# Altium PCB pcbxiao.PcbDoc (part 3 of 3)
Units mil, origin at the board's own origin, x right, y up, seen from the top; angles counter-clockwise.
Board outline 4666.32 x 1182.42 mil, 4 copper layers (Top Layer, Mid-Layer 1, Mid-Layer 2, Bottom Layer); 288 components, 144 nets, 734 pads, 278 vias.
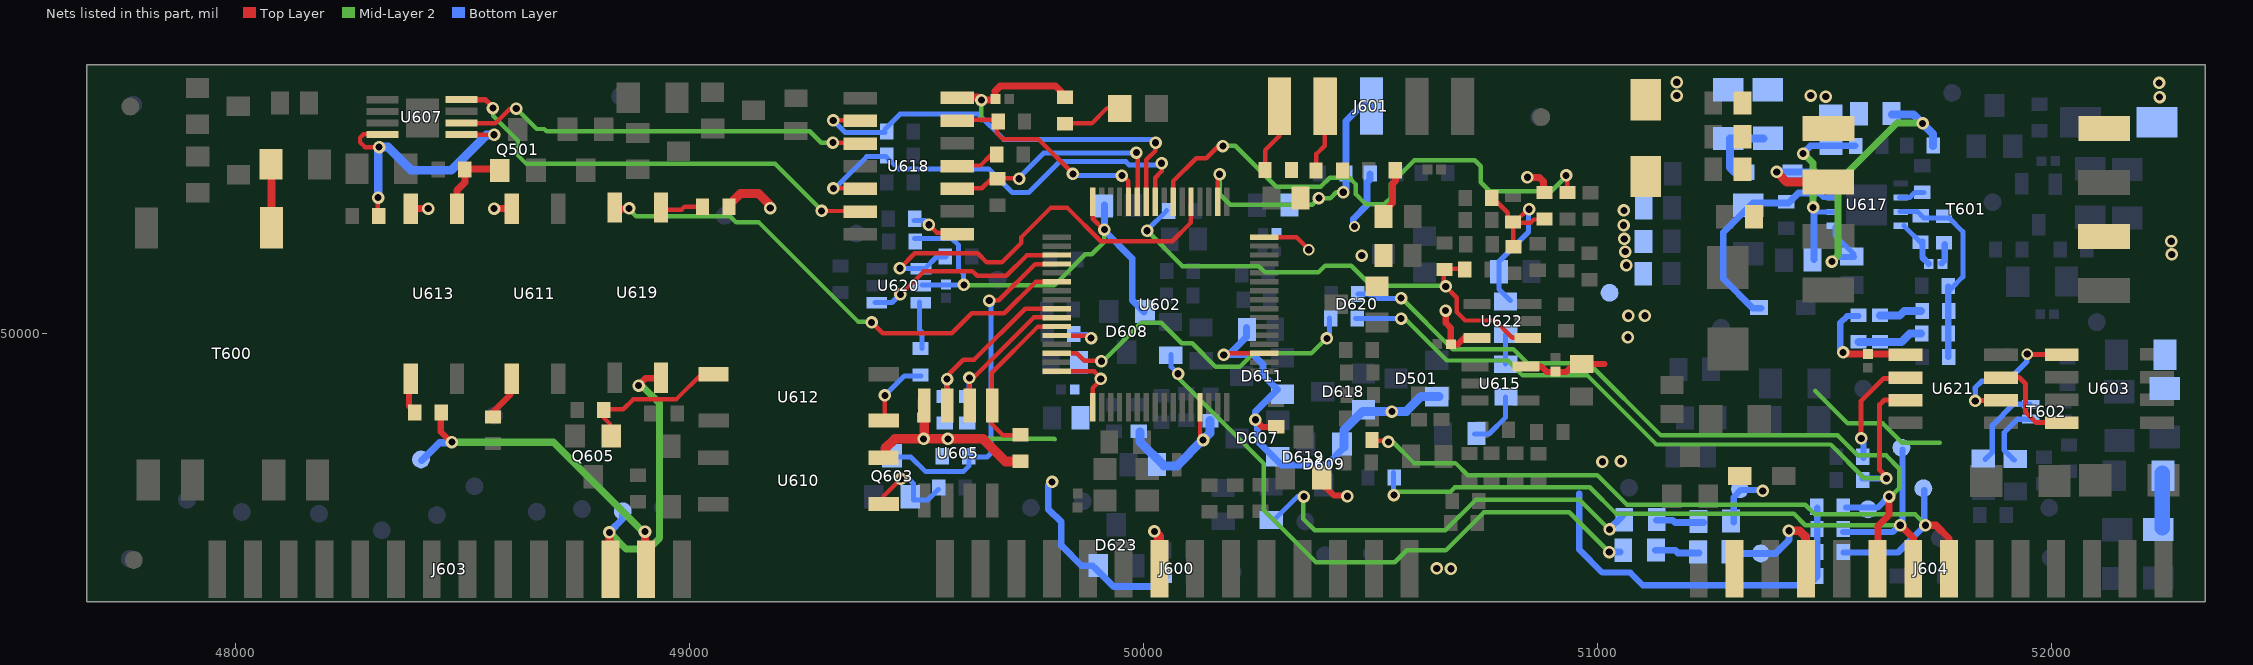
[diagram p4: the nets of this part, all layers, seen from the top]

## Via types
v1: diameter 27.56, hole 15.75, Top Layer to Bottom Layer, 267 vias
v2: diameter 25, hole 15.75, Top Layer to Bottom Layer, 7 vias
v3: diameter 24, hole 15.75, Top Layer to Bottom Layer, 4 vias

## Nets (pads, with @x,y where several pads share a name; then routed paths per layer and width w, separated by ;. In a path a pad name is that pad's centre, name@x,y a point inside that pad or via, vN(x,y) a via of type N, cw(c..) or ccw(c..) an arc to the next point about the centre after c; other vN are vias at no path point) (continued)
NetJ603_12: J603.12 TP5.1 U619.4 | length 660.3
  Top Layer w13.78: v1@48887.14,49885 48887.36,49885.22 48902.97,49900.83 U619.4@48933.18,49900.83
  Top Layer w17.72: J603.12@48823.6,49504.17 v1@48823.6,49560.83
  Mid-Layer 2 w15.75: v1@48822.92,49562.08 48860,49525 48910,49525 48934.17,49549.17 48934.17,49845 48894.17,49885 v1@48885.83,49885
  Bottom Layer w15.75: v1@48824.17,49562.92 48852.08,49590.83 TP5.1@48852.08,49605
  other v1: 48823.52,49561.14 48887.69,49884.89
NetJ603_13: J603.13 R716.2 TP31.1 | length 720.3
  Top Layer w13.78: R716.2@48451.72,49826.25 48451.72,49783.12 v1@48473.6,49761.25
  Top Layer w17.72: J603.13@48901.51,49506.25 v1@48901.51,49562.92
  Mid-Layer 2 w15.75: v1@48475.83,49760 48700,49760 48895.83,49564.17 v1@48902.08,49564.17
  Bottom Layer w15.75: TP31.1@48410,49720 48448.96,49758.96 v1@48476.04,49758.96
  other v1: 48901.86,49563.22 48476.44,49760.3
NetJ604_4: J604.4 R618.2 TP23.1 | length 261
  Top Layer w19.68: v1@51421.35,49565 51445.1,49565 51457.8,49552.29 J604.4@51457.8,49489.58
  Bottom Layer w14.96: R618.2@51297.92,49515 TP23.1@51359.58,49515 51392.08,49515 51422.08,49545 v1@51422.08,49565
  other v1: 51421.9,49564.89
NetJ604_6: J604.6 R503.2 R695.1 TP25.1 | length 1691.9
  Top Layer w15.75: J604.6@51617.8,49489.17 51617.8,49575.21 51642.18,49599.58 v1@51642.18,49639.58
  Mid-Layer 2 w9.84: v1@50567.92,50077.92 50680.83,49965 50815,49965 50845.83,49934.17 50980.83,49934.17 51140,49775 51529.17,49775 51573.33,49730.83 51635.83,49730.83 51665,49701.67 51665,49659.17 51645.83,49640 v1@51637.92,49640
  Bottom Layer w11.02: R695.1@50472.92,50086.04 50497.08,50086.04 50506.04,50077.08 v1@50567.08,50077.08
  Bottom Layer w13.78: R503.2@51547.92,49616.04 51617.08,49616.04 v1@51641.04,49640
  other v1: 51642.31,49640.3 50567.31,50077.39
NetJ604_7: J604.7 R649.2 R690.1 TP26.1 | length 1594.8
  Top Layer w15.75: v1@51667.6,49577.08 51695.51,49549.17 J604.7@51695.51,49499.38
  Mid-Layer 2 w9.84: v1@50551.04,49644.17 50557.92,49651.04 50676.25,49651.04 50686.04,49660.83 50982.92,49660.83 51040.83,49602.92 51432.08,49602.92 51457.92,49577.08 v1@51665.83,49577.08
  Bottom Layer w11.02: v1@50551.04,49643.96 R690.1@50551.04,49692.92
  Bottom Layer w13.78: R649.2@51541.04,49562.08 51650,49562.08 51665.89,49577.98 51672.08,49584.17 TP26.1@51672.08,49744.17
  other v1: 51666.9,49576.97 50551.48,49643.64
NetJ604_8: J604.8 R648.2 R691.1 TP27.1 | length 1680.6
  Top Layer w9.84: R691.1@50502.18,49763.75 v1@50539.89,49763.75
  Top Layer w15.75: v1@51721.55,49577.08 51745.1,49577.08 51774.26,49547.92 J604.8@51774.26,49514.17
  Mid-Layer 2 w9.84: v1@50538.96,49761.04 50548.96,49761.04 50595.83,49714.17 50687.08,49714.17 50714.17,49687.08 51000,49687.08 51065,49622.08 51457.92,49622.08 51479.17,49600.83 51700,49600.83 51723.09,49577.75 v1@51724.79,49576.04
  Bottom Layer w13.78: R648.2@51542.08,49517.08 51662.08,49517.08 51720,49575 TP27.1@51720,49655
  other v1: 51722.31,49576.97 50539.4,49760.72
NetLB602_2: LB602.2 T602.2 | length 183.1
  Bottom Layer w11.81: LB602.2@51854.17,49722.08 51870,49737.92 51870,49797.08 51916.88,49843.96 T602.2@51952.08,49843.96
NetLB603_2: LB603.2 T602.3 | length 140.7
  Bottom Layer w11.81: LB603.2@51917.92,49720.83 51895.83,49742.92 51895.83,49780.83 51925.83,49810.83 T602.3@51955,49810.83
NetQ501_1: Q501.1 R504.1 U613.3 | length 179.6
  Top Layer w15.75: U613.3@48487.39,50267.08 48487.39,50315 48505.1,50332.71 48505.1,50361.67 Q501.1@48582.8,50361.67
NetQ603_1: Q603.1 R669.2 U610.3 | length 206.1
  Top Layer w9.84: U610.3@49427.39,49620.21 49427.39,49640.83 v1@49464.89,49678.33
  Bottom Layer w11.02: v1@49466.04,49680 49482.08,49680 49492.92,49669.17 49492.92,49632.92 49525,49632.92 R669.2@49548.12,49656.04
  other v1: 49465.65,49679.05
NetQ603_3: Q603.3 R812.1 U602.52 | length 774.4
  Top Layer w9.84: v1@49661.35,50072.5 49681.35,50072.5 49761.35,50152.5 U602.52@49808.64,50152.5
  Bottom Layer w11.02: Q603.3@49450,49727.08 49487.92,49727.08 49520,49695 49603.12,49695 49616.04,49707.92 49616.04,49727.08 49655.21,49727.08 49666.04,49737.92 ; v1@49660,50071.04 v1@49664.04,50067 ; 49664.04,49739.92 v1@49664.04,50067 ; v1@49666.04,50065 v1@49664.04,50067
  other v1: 49660.23,50071.97
NetQ605_1: Q605.1 R813.2 U612.3 | length 320.2
  Top Layer w9.84: Q605.1@48824.64,49768.12 48824.64,49800.21 48812.56,49812.29 48812.56,49832.29 48853.81,49832.29 48875.68,49854.17 48970.26,49854.17 U612.3@49029.85,49913.75
NetR600_2: R600.2 U602.41 U618.5 | length 970.5
  Top Layer w9.84: v1@49316.97,50319.79 U618.5@49376.35,50319.79 ; U602.41@50025.72,50285.21 50025.72,50342.92 50039.68,50356.88 v1@50039.68,50375.62
  Bottom Layer w11.02: v1@49316.04,50320 49321.04,50320 49390.21,50389.17 49432.92,50389.17 49460,50362.08 49658.96,50362.08 49711.04,50310 49747.08,50310 49815,50377.92 49961.04,50377.92 49967.92,50371.04 50032.92,50371.04 v1@50036.88,50375
  other v1: 49316.9,50319.26 50039.81,50374.47
NetR601_1: R601.1 R617.1 R641.1 R644.2 R689.1 R711.1 | length 497.7
  Top Layer w9.84: R601.1@50769.05,50298.54 50802.39,50265.21 50802.39,50243.96 R711.1@50817.39,50243.96 ; R644.2@50814.47,50189.38 50814.47,50241.04 R711.1@50817.39,50243.96 ; v1@50848.43,50275 R711.1@50817.39,50243.96 ; R641.1@50889.05,50250.62 50859.47,50250.62 50852.8,50243.96 R711.1@50817.39,50243.96
  Bottom Layer w11.02: R617.1@50807.92,50072.08 50782.92,50097.08 50782.92,50157.92 50847.92,50222.92 v1@50847.92,50275
  other v1: 50849.28,50273.22
NetR608_1: R608.1 R617.2 | length 65
  Bottom Layer w11.02: R608.1@50797.92,49932.08 R617.2@50797.92,49997.08
NetR608_2: R608.2 R609.1 | length 129.4
  Bottom Layer w11.02: R609.1@50728.96,49777.92 50761.04,49777.92 50797.92,49814.79 R608.2@50797.92,49860
NetR610_1: R610.1 R611.1 | length 1342.4
  Mid-Layer 2 w9.84: v1@50075,49912.08 50075,49902.92 50265,49712.92 50265,49610.83 50380,49495.83 50553.75,49495.83 50580,49522.08 50666.25,49522.08 50750,49605.83 50937.92,49605.83 v1@51025.83,49517.92
  Bottom Layer w11.02: R610.1@50061.04,49952.92 50061.04,49926.04 v1@50076.04,49911.04
  Bottom Layer w14.96: v1@51026.04,49517.92 R611.1@51050,49517.92
  other v1: 51026.06,49517.8 50076.06,49910.72
NetR611_2: R611.2 R618.1 | length 99.4
  Bottom Layer w14.96: R611.2@51127.08,49522.08 51171.04,49522.08 51177.08,49516.04 R618.1@51223.96,49516.04
NetR621_1: R621.1 R810.1 | length 917.6
  Mid-Layer 2 w9.84: v1@50352.08,49640 50352.08,49590.83 50377.08,49565.83 50665,49565.83 50732.08,49632.92 50960.83,49632.92 v1@51025.83,49567.92
  Bottom Layer w11.02: R621.1@50288.96,49590 50338.96,49640 v1@50353.96,49640
  Bottom Layer w14.96: v1@51025,49567.92 51025.89,49568.81 51052.71,49595.62 R810.1@51056.04,49598.96
  other v1: 51026.9,49567.8 50353.22,49640.21
NetR622_1: R622.1 U602.57 U605.7 | length 398.5
  Top Layer w9.84: U605.7@49566.76,49849.38 49566.76,49905 49603.22,49941.46 49626.76,49941.46 49739.47,50054.17 U602.57@49809.89,50054.17
  Bottom Layer w11.02: R622.1@49567.08,49860 v1@49567.08,49897.92
  other v1: 49567.31,49899.05
NetR623_1: R623.1 U602.58 U605.6 | length 353.1
  Top Layer w9.84: U605.6@49615.93,49830.42 49615.93,49902.08 49625.51,49902.08 49758.22,50034.79 U602.58@49809.26,50034.79
  Bottom Layer w11.02: R623.1@49616.04,49868.96 v1@49616.04,49902.08
  other v1: 49616.48,49901.55
NetR624_2: R624.2 U602.59 U605.5 | length 377.3
  Top Layer w9.84: R624.2@49734.68,49775.83 49689.89,49775.83 49665.51,49800.21 49665.51,49912.92 49767.39,50014.79 U602.59@49808.64,50014.79
NetR631_2: R631.2 U602.42 U618.2 | length 971.9
  Top Layer w9.84: v1@49315.72,50468.96 U618.2@49384.26,50468.96 ; U602.42@50006.35,50287.71 50006.35,50382.29 50026.35,50402.29 v1@50026.35,50420.42
  Bottom Layer w11.02: v1@49316.04,50468.96 49342.92,50442.08 R631.2@49430,50442.08 ; R631.2@49430,50448.96 49463.96,50482.92 49636.04,50482.92 49691.88,50427.08 50017.08,50427.08 50025.59,50418.58 v1@50026.25,50417.92
  other v1: 50026.69,50419.68 49316.48,50469.05
NetR634_2: R634.2 U602.39 | length 1189.3
  Top Layer w9.84: U602.39@50065.1,50285.21 50065.1,50335 50115.93,50385.83 50138.43,50385.83 50165.72,50413.12 v1@50171.76,50413.12 ; v1@50929.68,50347.08 50933.43,50343.33 R634.2@50933.43,50309.38
  Mid-Layer 2 w9.84: v1@50174.17,50412.92 50202.08,50412.92 50292.08,50322.92 50390,50322.92 50410,50342.92 50452.92,50342.92 50467.92,50327.92 50467.92,50306.04 50486.88,50287.08 50490,50283.96 50530,50283.96 50545,50298.96 50545,50328.96 50596.88,50380.83 50730,50380.83 50742.92,50367.92 50742.92,50332.92 50762.92,50312.92 50897.92,50312.92 v1@50932.08,50347.08
  other v1: 50930.95,50347.8 50174.81,50412.39
NetR635_2: R635.2 U602.37 U620.4 | length 931.8
  Top Layer w9.84: v1@49464.26,50143.96 49496.35,50176.04 49634.68,50176.04 49654.68,50156.04 49688.01,50156.04 49731.14,50199.17 49731.14,50211.88 49795.3,50276.04 49832.39,50276.04 49905.72,50202.71 50063.22,50202.71 50104.47,50243.96 U602.37@50104.47,50296.04
  Bottom Layer w11.02: v1@49462.08,50142.92 49518.96,50142.92 49543.96,50167.92 R635.2@49565,50167.92
  other v1: 49463.56,50143.22
NetR651_2: R651.2 T600.1 | length 156.2
  Top Layer w17.72: T600.1@48079.05,50217.5 R651.2@48079.05,50373.75
NetR665_1: R665.1 U618.8 | length 116.9
  Top Layer w9.84: v1@49526.14,50240.42 49544.89,50221.67 U618.8@49594.68,50221.67
  Bottom Layer w11.02: R665.1@49493.96,50248.96 49518.96,50248.96 49528.09,50239.83 v1@49530,50237.92
  other v1: 49527.31,50239.05
NetR666_2: R666.2 U618.11 | length 111.2
  Top Layer w9.84: U618.11@49579.47,50369.58 49640.72,50369.58 49663.22,50392.08 R666.2@49681.35,50392.08
NetR675_2: R675.2 R808.2
NetR682_2: R682.2 U621.2 | length 252.3
  Top Layer w11.02: v1@51580.3,49768.75 51580.3,49850.42 51630.72,49900.83 U621.2@51685.72,49900.83
  Bottom Layer w13.78: v1@51580,49767.92 51586.04,49761.88 R682.2@51586.04,49726.04
  other v1: 51581.06,49768.22
NetR683_2: R683.2 U602.62 | length 755.1
  Top Layer w9.84: U602.62@49805.62,49956.04 49852.91,49956.04 49869.37,49939.58 v1@49908.64,49939.58
  Mid-Layer 2 w9.84: v1@49910,49937.92 49995,50022.92 50039.17,50022.92 50084.17,49977.92 50107.08,49977.92 50159.17,49925.83 50212.08,49925.83 50242.08,49955.83 50370,49955.83 v1@50404.17,49990
  Bottom Layer w11.02: v1@50402.08,49988.12 50410,49996.04 R683.2@50410,50033.96
  other v1: 49907.31,49938.22 50403.98,49988.64
NetR693_2: R693.2 U619.1 | length 93.8
  Top Layer w9.84: U619.1@48938.64,50272.5 48982.39,50272.5 48989.05,50279.17 R693.2@49029.68,50279.17
NetR716_1: R716.1 U613.1 | length 83.7
  Top Layer w13.78: U613.1@48381.93,49903.33 48381.93,49840.21 R716.1@48396.51,49825.62
NetR717_1: R717.1 U620.6 | length 105.6
  Bottom Layer w11.02: U620.6@49506.04,50069.17 49506.04,50008.12 49512.08,50002.08 R717.1@49512.08,49966.04
NetR717_2: R717.2 U612.1 | length 156
  Top Layer w9.84: U612.1@49430.3,49806.25 v1@49430.3,49864.38
  Bottom Layer w11.02: v1@49430,49862.92 49473.12,49906.04 R717.2@49510,49906.04
  other v1: 49430.23,49863.22
NetR721_1: R721.1 U611.1 | length 100.9
  Top Layer w13.78: R721.1@48566.31,49815.42 48566.31,49826.04 48605.26,49865 U611.1@48605.26,49900.21
NetR802_2: R802.2 R807.2 | length 121.2
  Bottom Layer w33.47: R802.2@52244.17,49570.83 R807.2@52244.17,49692.08
NetR809_1: R809.1 R810.2 | length 106
  Bottom Layer w14.96: R810.2@51130,49587.92 51166.04,49587.92 51171.04,49582.92 R809.1@51233.96,49582.92
NetR821_1: R821.1 U602.43 U618.10 | length 549.8
  Top Layer w9.84: U618.10@49578.85,50319.17 49643.85,50319.17 49666.35,50341.67 v1@49725.1,50341.67 ; U602.43@49986.97,50287.08 v1@49986.97,50397.92
  Bottom Layer w11.02: v1@49726.04,50340 49726.04,50343.12 49780,50397.08 v1@49983.96,50397.08
  other v1: 49726.06,50340.3 49984.4,50398.01
NetR822_2: R822.2 U602.44 U618.13 | length 510.7
  Top Layer w9.84: U618.13@49578.22,50470.83 49677.18,50470.83 49677.18,50441.04 49690.51,50427.71 49768.64,50427.71 v1@49846.35,50350 ; v1@49951.76,50345.83 49955.93,50345.83 49966.87,50334.9 U602.44@49966.87,50287.6
  Bottom Layer w11.02: v1@49846.04,50352.08 49851.04,50347.08 v1@49952.08,50347.08
  other v1: 49952.31,50347.18 49844.4,50351.14
NetR836_1: R836.1 U607.1@48497.27,50437.81 U607.8 | length 647.3
  Top Layer w9.84: R836.1@48313.64,50256.67 v1@48313.64,50299.17 ; v1@48317.18,50410.21 48284.89,50410.21 48274.05,50421.04 48274.05,50430.62 48281.35,50437.92 U607.8@48323.85,50437.92 ; U607.1@48493.01,50437.5 v1@48569.47,50437.5
  Bottom Layer w19.68: v1@48314.17,50300 48314.17,50410 48335.83,50410 48386.67,50359.17 48475,50359.17 48552.92,50437.08 v1@48569.17,50437.08
  other v1: 48313.94,50299.05 48316.02,50410.1 48569.36,50437.39
NetR837_1: R837.1 U602.60 | length 122.6
  Top Layer w9.84: U602.60@49805.62,49994.79 49877.18,49994.79 v1@49882.6,49989.38
  Bottom Layer w11.02: R837.1@49843.96,49997.08 49875.83,49997.08 v1@49883.96,49988.96
  other v1: 49884.4,49989.47
NetU602_51: U602.51 U620.1 | length 450.4
  Top Layer w9.84: v1@49464.26,50084.58 49464.9,50085.22 49516.35,50136.67 49623.22,50136.67 49633.43,50126.46 49697.8,50126.46 49743.22,50171.88 U602.51@49807.49,50171.88
  Bottom Layer w11.02: U620.1@49408.96,50067.92 49445.83,50067.92 v1@49463.96,50086.04
  other v1: 49464.4,50085.72
NetU602_54: U602.54 U619.2 | length 1133
  Top Layer w9.84: v1@49402.39,50023.33 49425.51,50000.21 49577.6,50000.21 49621.35,50043.96 49693.43,50043.96 49762.6,50113.12 U602.54@49810.51,50113.12
  Top Layer w15.75: U619.2@48835.72,50273.75 v1@48863.64,50273.75
  Mid-Layer 2 w9.84: v1@48865,50275 48882.08,50257.92 49089.17,50257.92 49102.92,50244.17 49152.92,50244.17 49372.08,50025 v1@49402.08,50025
  other v1: 49401.06,50024.05 48866.86,50274.89
NetU603_4: U603.4 U621.7 | length 203.5
  Top Layer w11.02: U621.7@51899.26,49902.71 51928.85,49902.71 51943.43,49888.12 51943.43,49826.25 51966.55,49803.12 U603.4@52025.3,49803.12
NetU607_2: U607.2 U618.3 | length 920.9
  Top Layer w9.84: U607.2@48492.39,50462.92 48572.39,50462.92 48603.22,50493.75 v1@48616.76,50493.75 ; v1@49314.47,50419.79 U618.3@49367.8,50419.79
  Mid-Layer 2 w9.84: v1@48617.08,50496.04 48663.12,50450 48680,50450 48685,50445 49265,50445 49290,50420 v1@49316.04,50420
  other v1: 49315.65,50419.89 48618.11,50494.89
NetU607_4: U607.4 U618.6 | length 1012.5
  Top Layer w9.84: v1@49290.3,50269.38 U618.6@49370.93,50269.38
  Top Layer w11.81: U607.4@48491.76,50514.38 48550.51,50514.38 48566.76,50498.12 v1@48566.76,50495
  Mid-Layer 2 w9.84: v1@48567.08,50497.08 48567.08,50478.96 48621.04,50425 48621.04,50392.71 48640.83,50372.92 49188.75,50372.92 v1@49290.83,50270.83
  other v1: 49291.02,50269.47 48566.86,50496.14
NewNet2: C681.1 U617.2@51667.92,50299.17 | length 58.5
  Bottom Layer w11.02: U617.2@51665,50298.96 51687.92,50298.96 51698.96,50310 C681.1@51718.96,50310
NewNet3: C601.2 C639.2 R602.2 R605.2 R647.2 R804.2 U617.3@51667.92,50267.08 | length 450.3
  Bottom Layer w11.02: U617.3@51666.04,50267.92 51705,50267.92 51713.23,50259.69 51718.96,50253.96 51775,50253.96 51805,50223.96 51805,50124.17 51779.27,50098.44 R605.2@51777.92,50097.08
  Bottom Layer w13.78: R804.2@51772.92,49947.92 R605.2@51772.92,50102.92
NewNet4: C638.2 C639.1 U617.4@51667.92,50236.67 | length 111.5
  Bottom Layer w11.02: U617.4@51675,50237.08 C639.1@51715,50197.08
  Bottom Layer w13.78: C639.1@51716.04,50202.08 51716.04,50166.88 C638.2@51730,50152.92
NewNet5: C637.2 R645.2 R680.1 U617.4@51520.42,50236.63 | length 684.9
  Mid-Layer 2 w15.75: v1@51515.83,50157.92 51516.1,50158.18 51530,50172.08 51530,50332.92 51660,50462.92 v1@51715,50462.92
  Bottom Layer w11.02: U617.4@51522.92,50233.96 51522.92,50216.04 51564.92,50174.04 C637.2@51565,50173.96
  Bottom Layer w13.78: v1@51516.04,50157.92 51526.04,50167.92 C637.2@51565,50167.92
  Bottom Layer w17.72: R680.1@51649.17,50482.08 51695.83,50482.08 51715.8,50462.12 51739.17,50438.75 R645.2@51739.17,50412.08
  other v1: 51516.48,50157.8 51716.06,50462.39
NewNet6: C632.2 R640.2 R646.1 U617.3@51520.42,50267.05 | length 405.7
  Mid-Layer 2 w15.75: v1@51454.17,50395.83 51475,50375 v1@51475,50277.92
  Bottom Layer w11.02: v1@51477.92,50267.08 U617.3@51520,50267.08
  Bottom Layer w14.96: v1@51452.08,50395.83 51469.17,50412.92 R646.1@51567.08,50412.92 ; C632.2@51477.08,50162.08 v1@51477.08,50277.08
  other v1: 51474.81,50277.39 51453.15,50395.72
NewNet7: C634.2 C687.2 D600.1 U617.2@51520.42,50299.13 | length 492.6
  Bottom Layer w11.02: 51487.92,50308.96 51497.92,50298.96 U617.2@51520,50298.96
  Bottom Layer w14.96: D600.1@51360,50055 51342.92,50055 51277.08,50120.83 51277.08,50222.08 51342.08,50287.08 51421.04,50287.08 51442.92,50308.96 51486.04,50308.96
NewNet8: D606.2 T601.2 U617.1@51520.42,50329.96 | length 258.5
  Top Layer w19.68: v1@51396.14,50354.17 51417.39,50332.92 T601.2@51507.39,50332.92
  Bottom Layer w11.02: 51481.04,50353.96 51506.04,50328.96 U617.1@51522.08,50328.96
  Bottom Layer w14.96: v1@51393.96,50355 51481.04,50355
  other v1: 51394.81,50355.3
NewNet13: C638.1 R647.1 | length 45
  Bottom Layer w13.78: C638.1@51757.92,50153.96 51758.26,50154.3 51765,50161.04 R647.1@51765,50196.04
NewNet21: C606.2 R683.1 U621.3 | length 1598.6
  Top Layer w11.02: v1@51639.05,49681.46 51621.55,49698.96 51621.55,49842.71 51632.39,49853.54 U621.3@51680.3,49853.54
  Mid-Layer 2 w9.84: v1@50567.08,50032.92 50575,50032.92 50667.92,49940 50802.08,49940 50835,49907.08 50977.92,49907.08 51130,49755 51513.75,49755 51587.92,49680.83 v1@51637.08,49680.83
  Bottom Layer w11.02: R683.1@50467.08,50032.92 v1@50566.04,50032.92
  Bottom Layer w13.78: C606.2@51583.96,49680 v1@51636.04,49680
  other v1: 51636.48,49680.3 50567.31,50032.39
NewNet24: R602.1 R606.1 R607.1 | length 145.5
  Bottom Layer w17.72: R607.1@51575,49980.83 51670,49980.83 51688.33,49999.17 R602.1@51712.92,49999.17
NewNet25: C601.1 R606.2 | length 95
  Bottom Layer w17.72: R606.2@51622.08,50039.17 51665.83,50039.17 51675.83,50049.17 C601.1@51712.92,50049.17
NewNet27: D617.2 T601.8
  other v1: 52238.15,50520.3 52237.31,50551.55
NewNet34: C603.2 C660.2 R604.2 U622.1 | length 1114.6
  Top Layer w9.84: C603.2@50705.3,50142.08 50661.76,50142.08 50661.76,50106.46 50690.3,50077.92 50690.3,50046.88 50709.05,50028.12 50774.47,50028.12 50812.6,49990 U622.1@50846.14,49990
  Mid-Layer 2 w9.84: v1@50007.92,50225.83 50085.83,50147.92 50253.96,50147.92 50267.92,50133.96 50385,50133.96 50400,50148.96 50457.92,50148.96 50501.88,50105 v1@50667.92,50105
  Bottom Layer w11.02: v1@50007.08,50226.04 50007.25,50226.21 R604.2@50051.04,50270
  other v1: 50665.95,50103.22 50007.73,50225.72
NewNet74: D601.2 J604.2 R809.2 TP21.1 | length 125.6
  Bottom Layer w13.78: R809.2@51300,49583.96 51300,49638.96 51316.04,49655 v1@51363.96,49655
  other v1: 51363.98,49652.8
NewNet88: C610.2 C611.2 C625.2 C655.2 LB600.2 R640.1 R674.2 R680.2 T601.1
  other v1: 51502.73,50521.55 51469.81,50523.64
NewNet96: C655.1 D606.1 R674.1 | length 177.4
  Bottom Layer w17.72: D606.1@51327.08,50354.17 51302.92,50354.17 51292.08,50365 51292.08,50429.17 R674.1@51365.83,50429.17
NewNet114: D614.2 R684.2 | length 142.8
  Top Layer w9.84: R684.2@49826.35,50462.92 49886.35,50462.92 49919.68,50496.25 D614.2@49955.3,50496.25
NewNet122: D603.2 T601.6
  other v1: 52265.23,50173.64 52263.98,50202.8 51174.81,50523.64 51174.81,50552.8
NewNet128: U603.1 U621.6 | length 322.1
  Top Layer w11.02: v1@51832.6,49852.29 U621.6@51892.6,49852.29 ; v2@51946.55,49953.54 U603.1@52024.68,49953.54
  Bottom Layer w11.81: v1@51832.08,49851.04 51832.08,49880 51846.04,49893.96 51902.08,49893.96 51946.04,49937.92 v2@51946.04,49955
  other v1: 51832.31,49851.14
  other v2: 51946.9,49954.05
NewNet139: J601.2 R626.2 | length 146.5
  Top Layer w9.84: R626.2@50380.93,50357.29 50380.93,50395 50399.05,50413.12 J601.2@50399.05,50496.25
NewNet144: J601.1 R625.2 | length 138.2
  Top Layer w9.84: R625.2@50267.8,50357.5 50267.8,50403.33 50298.64,50434.17 J601.1@50298.64,50482.92
VCC: C505.1 C506.1 C507.2 C613.2 C615.1 C620.2 C621.2 C636.1 C664.1 C665.2 C666.1 C675.1 C676.1 C688.2 C699.1 C700.1 C816.2 C817.2 C818.2 C821.2 C822.1 C824.2 D501.2 D603.1 D607.2 D608.2 D609.2 D611.2 D618.2 D619.2 D620.2 D623.2 J600.7 J601.8 R502.1 R503.1 R505.1 R607.2 R613.1 R622.2 R623.2 R624.1 R625.1 R626.1 R627.1 R641.2 R648.1 R649.1 R684.1 R693.1 R703.1 R812.2 R838.2 R840.2 R841.1 R842.2 TP14.1 U602.1 U602.13 U602.19 U602.32 U602.34 U602.48 U602.64 U605.8 U610.4 U611.4 U613.4 U615.5 U618.14 U620.5 U621.1 U622.5 | length 7127
  Top Layer w9.84: U602.64@49803.85,49916.04 49891.14,49916.04 49908.01,49899.17 49888.12,49879.27 U602.1@49888.12,49851.15 ; U602.48@49888.01,50291.88 49888.01,50252.5 49913.14,50227.38 v1@49914.68,50225.83 ; U602.13@50124.47,49838.33 50124.47,49772.29 v1@50132.39,49764.38 ; U602.34@50164.05,50287.71 50164.05,50344.58 v1@50169.47,50350 ; v1@50176.14,49951.88 50176.77,49952.51 50180.3,49956.04 U602.19@50266.35,49956.04 ; U602.32@50258.64,50211.88 50336.76,50211.88 v2@50358.64,50190
  Top Layer w13.78: v1@50245.72,49809.38 50261.55,49793.54 R703.1@50290.1,49793.54 ; D619.2@50388.85,49673.54 50419.89,49642.5 v1@50448.85,49642.5 ; v1@50665.93,50050 50665.93,50022.71 50676.97,50011.67 50676.97,49976.04 50692.6,49976.04 50705.3,49988.75 U622.5@50733.85,49988.75 ; U615.5@50835.1,49926.25 50876.97,49926.25 50888.43,49914.79 50931.55,49914.79 50949.05,49932.29 51014.68,49932.29
  Top Layer w15.75: U613.4@48386.97,50275 v1@48423.22,50275 ; v1@48568.64,50275 U611.4@48609.89,50275 ; U618.14@49576.55,50519.79 49635.93,50519.79 49641.97,50513.75 49672.8,50513.75 49672.8,50533.12 49684.47,50544.79 49806.35,50544.79 R684.1@49828.22,50522.92 ; C505.1@50520.51,50259.17 50548.43,50287.08 50548.43,50328.96 50555.1,50335.62 R841.1@50555.1,50361.67 ; v1@50846.65,50343.33 50872.07,50343.33 50881.03,50334.38 R641.2@50881.03,50312.5 ; v1@51542.2,49958.94 51546.97,49954.17 U621.1@51686.97,49954.17
  Top Layer w19.68: R693.1@49085.93,50281.67 49111.97,50307.71 49151.97,50307.71 49176.97,50282.71 v1@49176.97,50276.04
  Top Layer w21.65: U610.4@49431.97,49724.58 49431.97,49746.88 49452.6,49767.5 49515.65,49767.5 49646.14,49767.5 49695.93,49717.71 R624.1@49725.51,49717.71 ; v1@49516.97,49769.79 U605.8@49516.97,49842.08 ; v1@50025.1,49561.88 50034.26,49552.71 J600.7@50034.26,49515.83
  Mid-Layer 2 w10: v1(49515.65,49767.39) v1(49568.98,49767.39) 49803.61,49767.39 49804,49767 ; v1@49605.83,50105.83 49803.83,50105.83 49872,50174 49886,50174 49913.98,50201.98 v1(49913.98,50228.22) ; 49642.73,50469.27 v1(49642.73,50513.64) ; v1(50167.73,50350.3) 50167.73,50306.27 50191,50283 50371.68,50283 v1(50386.48,50297.8) 50411.8,50297.8 50424.62,50310.62 v1(50439.89,50310.62) ; 51480,49872.92 51550.92,49802 51628,49802 51671,49759 51754,49759
  Bottom Layer w11.02: R505.1@49496.04,50208.96 49577.92,50208.96 49592.92,50193.96 49592.92,50141.04 49603.96,50130 49603.96,50106.04 U620.5@49512.08,50106.04
  Bottom Layer w13.78: 50960,49647.08 50960,49523.75 51010.83,49472.92 51072.08,49472.92 51100,49445 51465.21,49445 51484.17,49463.96 R503.1@51484.17,49615.83 ; v1@51541.88,49957.08 51535,49963.96 51535,50022.92 51550,50037.92 R607.2@51575,50037.92
  Bottom Layer w14.96: v1@49797.92,49672.92 49790,49665 49790,49612.92 49818.96,49583.96 49818.96,49532.08 49863.12,49487.92 49887.92,49487.92 49893.83,49482 49933.75,49442.08 50027.92,49442.08 R840.2@50049.79,49463.96 ; C666.1@49914.17,50282.92 49914.17,50225.83 49975,50165 49975,50072.92 D608.2@50001.04,50046.88 ; v1@50177.08,49952.92 v1@50187.92,49952.92 ; C664.1@50227.08,50012.92 50227.08,49992.08 v1@50187.92,49952.92 ; v1@50437.08,50309.17 50445.83,50317.92 50445.83,50467.5 50479.17,50500.83 J601.8@50500,50500.83 ; D609.2@50442.08,49748.12 50403.96,49710 50303.96,49710 50290.77,49723.19 50251.04,49762.92 50251.04,49806.04 50246.04,49811.04 50246.04,49826.88 50295,49875.83 50262.92,49907.92 50262.92,49931.04 50241.04,49952.92 v1@50187.92,49952.92 ; v3@50462.08,50237.08 50462.08,50252.08 50492.08,50282.08 50492.08,50332.08 50498.96,50338.96 R842.2@50498.96,50351.04
  Bottom Layer w19.68: R838.2@49992.08,49782.92 49992.08,49761.04 50045.21,49707.92 50073.96,49707.92 50131,49764.95 50146.04,49780 C821.2@50146.04,49807.92 ; D609.2@50442.08,49748.96 50442.08,49787.08 50482.92,49827.92 50547.31,49827.92 50578.96,49827.92 50612.08,49861.04 D501.2@50651.04,49861.04
  other v1: 50677.31,49481.14 50646.06,49481.97 50023.98,49563.64 50448.98,49641.14 49798.56,49672.39 51010.95,49716.97 51051.48,49718.22 50131.06,49764.89 50246.48,49809.47 50547.31,49827.39 49905.65,49899.47 50176.9,49952.39 51541.06,49957.8 51066.9,49991.14 51068.15,50038.64 51104.4,50038.64 50665.53,50049.89 49604.4,50106.55 51063.64,50150 50480.65,50171.14 51061.35,50179.79 51058.98,50207.8 51057.73,50237.8 51058.15,50270.72 48424.36,50274.47 48569.36,50274.47 49177.69,50275.72 50845.53,50343.64
  other v2: 50364,50184
  other v3: 50464.48,50235.39
pads on no net: 4.2 5.1 6.3 D502.2 D504.2 D622.2 ID1.1 ID3.1 ID6.1 J600.12 J600.14 J601.3 J603.3 J603.4 J604.10 J604.13 TP10.1 U602.2 U602.3 U602.4 U602.8 U602.9 U602.17 U602.29 U602.30 U602.35 U602.38 U602.40 U602.45 U603.5

## Polygon pours and split planes (outlines as drawn)
GND on Top Layer "Bottom Layer-No Net" (solid, remove dead copper, pour order 0): 49775.3,49892.29 49809.89,49892.29 49838.43,49863.75 49838.43,49775.42 49817.8,49754.79 49817.8,49648.2 49844,49622 49865,49622 49865,49612 49878,49599 50016,49599 50027,49610 50027,49637.08 50055.51,49637.08 50055.51,49669.79 50069.48,49683.76 50069.48,49695.54 50074.55,49695.54 50079.68,49690.42 50079.68,49678.96 50094.89,49663.75 50094.89,49561.89 50081,49548 50080,49549 49981,49549 49969,49537 49965.21,49540.79 49945.72,49540.79 49945.72,49548.27 49937.99,49556 49803.6,49556 49792.39,49544.79 49746.14,49591.04 49746.14,49861.04 49745.1,49862.08
VCC on Top Layer "Bottom Layer-No Net" (solid, remove dead copper, pour order 2): 49957.18,49983.33 49957.18,50071.46 50132.7,50246.98 50160.3,50246.98 50160.3,50261.56 50166.35,50261.56 50166.35,50247.6 50196.76,50247.6 50196.76,50247.61 50208.32,50259.17 50317.39,50259.17 50327.6,50269.38 50327.6,50326.46 50311.97,50342.08 50311.97,50379.17 50340.93,50379.17 50350.72,50369.38 50350.72,50337.92 50357.39,50331.25 50431.35,50331.25 50431.35,50344.58 50447.8,50344.58 50447.8,50335 50458.01,50324.79 50458.01,50305.83 50449.47,50297.29 50449.47,50253.15 50452,50250.62 50481.76,50250.62 50514.47,50283.33 50547.8,50283.33 50547.8,50140.83 50541.14,50134.17 50541.14,50082.71 50493,50082.71 50485.08,50090.62 50482.8,50090.62 50482.8,50128.12 50462.18,50148.75 50394.89,50148.75 50363.85,50179.79 50324.05,50179.79 50318.01,50185.83 50318.01,50219.79 50310.1,50227.71 50224.68,50227.71 50201.55,50204.58 50166.97,50204.58 50142.8,50180.42 50142.8,50066.87 50136.76,50060.83 50136.76,50031.25 50143.43,50024.58 50143.43,50010 50154.26,49999.17 50154.26,49982.08 50170.1,49966.25 50188.22,49966.25 50194.89,49959.58 50194.89,49947.5 50189.47,49942.08 50166.97,49942.08 50164.47,49944.58 50128.22,49944.58 50107.8,49965 50002,49965 49977.8,49940.8 49977.8,49898.96 49958.12,49879.27 49888.12,49879.27 49888.12,49914.27
GND on Top Layer "Bottom Layer-No Net" (solid, remove dead copper, pour order 30): 51517,50238 51518.17,50239.17 51578.64,50239.17 51605.72,50266.25 51605.72,50482.92 51617.8,50495 51756.56,50495 51791.14,50460.42 51791.14,50247.5 51845.72,50192.92 51990.3,50192.92 52047.8,50135.42 52166.55,50135.42 52176.35,50125.62 52176.35,50068.12 52019.89,50068.12 51970.72,50117.29 51831.35,50117.29 51787.6,50073.54 51787.6,50029.38 51780.93,50022.71 51634.26,50022.71 51624.47,50032.5 51624.47,50149.38 51583.85,50190 51514,50190
GND1 on Mid-Layer 1 "Bottom Layer-No Net" (solid, remove dead copper, pour order 4): 48368.33,49938.33 49060.83,49938.33 49085.83,49913.33 49085.83,49605 49068.33,49587.5 49068.33,49464.17 49033.33,49429.17 48241.67,49429.17 48230,49440.83 48230,49555 48242.92,49567.92 48322.08,49567.92 48360,49605.83 48360,49630 48345,49645 48345,49915
GND2 on Mid-Layer 1 "Bottom Layer-No Net" (solid, remove dead copper, pour order 6): 51850.83,50149.17 52208.33,50149.17 52240.83,50116.67 52240.83,50020 52278.33,49982.5 52278.33,49584.17 52204.17,49510 52070.83,49510 52037.5,49476.67 51981.67,49476.67 51821.67,49636.67 51821.67,49805 51855,49838.33 51855,49875 51842.92,49887.08 51842.92,50140
NewNet122 on Mid-Layer 1 "Bottom Layer-No Net" (solid, remove dead copper, pour order 8): 51155.83,50567.92 51690.83,50567.92 51780,50478.75 51780,50307.92 51830,50257.92 52262.92,50257.92 52275,50245.83 52275,50167.92 52269.17,50162.08 52255.83,50162.08 52232.92,50185 51765.83,50185 51707.92,50242.92 51707.92,50451.08 51679,50480 51565.83,50480 51548.75,50462.92 51412.08,50462.92 51364.17,50510.83 51165.83,50510.83 51155.83,50520.83
GND on Mid-Layer 1 "Bottom Layer-No Net" (solid, remove dead copper, pour order 10): 47676.27,50586.14 47677.48,50587.35 51112.65,50587.35 51137.08,50562.92 51137.08,50517.08 51160,50494.17 51352.92,50494.17 51406.25,50440.83 51572.92,50440.83 51585,50452.92 51659.17,50452.92 51687.08,50425 51687.08,50222.92 51787.92,50122.08 51787.92,49892.92 51775,49880 51775,49582.08 51847.92,49509.17 51847.92,49457.92 51843.75,49457.92 51815,49429.17 49482.83,49429.17 49344,49568 49344,50001 49137.92,50207.08 47678.35,50207.08 47676.27,50205
GND1 on Mid-Layer 2 "Bottom Layer-No Net" (solid, remove dead copper, pour order 12): 48388.33,49938.33 49050.83,49938.33 49075,49914.17 49075,49609.17 49058.33,49592.5 49058.33,49463.33 49033.33,49438.33 48470.83,49438.33 48438.33,49470.83 48438.33,49608.33 48343.33,49703.33 48343.33,49893.33
NetC501_1 on Mid-Layer 2 "Bottom Layer-No Net" (solid, remove dead copper, pour order 14): 47943.75,50512.08 48169.17,50512.08 48204.17,50547.08 48390,50547.08 48410.83,50567.92 48944.17,50567.92 48965,50547.08 48965,50489.17 48957.92,50482.08 48705,50482.08 48682.08,50505 48657.08,50505 48626.25,50535.83 48545,50535.83 48534.17,50525 48359.17,50525 48285,50450.83 48263.33,50429.17 47945.83,50429.17 47930.83,50444.17 47930.83,50499.17
GND on Mid-Layer 2 "Bottom Layer-No Net" (solid, remove dead copper, pour order 16): 49355,50465.83 49589.17,50465.83 49652.08,50402.92 49907.08,50402.92 49920,50390 49920,50330.83 49919.17,50330 49885.83,50330 49830,50274.17 49708.75,50274.17 49680,50302.92 49363.33,50302.92 49334.17,50332.08 49334.17,50445
NetC609_2 on Mid-Layer 2 "Bottom Layer-No Net" (solid, remove dead copper, pour order 18): 49132.08,50569.17 49962.92,50569.17 49964,50568.08 49964,50550.83 50185,50550.83 50185,50569.17 51142.92,50569.17 51204.17,50507.92 51352.08,50507.92 51410,50450 51407.08,50447.08 51407.08,50175.83 51519.17,50063.75 51519.17,49975 51508.12,49963.96 51462.08,49963.96 51302.92,50123.12 51302.92,50322.92 51282.92,50342.92 51114.17,50342.92 51024.17,50432.92 50897.92,50432.92 50865,50400 50772.92,50400 50737.92,50435 50347.92,50435 50262.92,50520 49291.25,50520 49264.17,50492.92 49127.08,50492.92 49107.92,50512.08 49107.92,50545
GND2 on Mid-Layer 2 "Bottom Layer-No Net" (solid, remove dead copper, pour order 20): 51852.08,50552.08 52262.08,50552.08 52274.17,50540 52274.17,50176.25 52242.92,50145 52242.92,50027.92 52274.17,49996.67 52274.17,49627.08 52239.17,49592.08 52220.83,49592.08 52133.75,49505 52065,49505 52035,49475 51965.83,49475 51812.08,49628.75 51812.08,49902.08 51845,49935 51845,50385.83 51835.83,50395 51835.83,50535.83
NetC504_1 on Mid-Layer 2 "Bottom Layer-No Net" (solid, remove dead copper, pour order 22): 51200.83,50322.08 51269.17,50322.08 51282.92,50308.33 51282.92,50255 51265,50237.08 51265,50114.17 51282.92,50096.25 51282.92,49902.08 51305,49880 51305,49860 51295.83,49850.83 51220.83,49850.83 51170.83,49900.83 51170.83,50292.08
VCC on Mid-Layer 2 "Bottom Layer-No Net" (solid, remove dead copper, pour order 24): 48407.08,50286.25 48462.49,50341 49179,50341 49270,50250 49347.92,50250 49387.08,50289.17 49670,50289.17 49700,50259.17 49735,50259.17 49801.17,50193 49857.93,50193 49886,50221.07 49886,50247 49898,50259 49932,50259 49941,50250 49941,50200 49915,50174 49872,50174 49872,49950 49896,49926 49925,49926 49938,49913 49938,49861 49885,49808 49885,49545 49904,49526 49905,49527 49997,49527 50006,49536 50006,49581 50018,49593 50040,49593 50052,49581 50083,49581 50169,49667 50169,49720 50153,49736 50121,49736 50112,49745 50112,49797 50175.83,49860.83 50562.08,49860.83 50572.08,49850.83 50839.17,49850.83 50867.92,49822.08 50995.83,49822.08 51130,49687.92 51065,49622.92 51065,49622.08 51000,49687.08 50714.17,49687.08 50687.08,49714.17 50595.83,49714.17 50595.83,49687.99 50500.65,49592.8 50385.11,49592.8 50265,49712.92 50249,49696.92 50249,49511.83 50285,49475.83 50560.83,49475.83 50585,49500 50683.75,49500 50697.92,49485.83 50697.92,49462.08 50685,49449.17 50597.92,49449.17 50582.92,49434.17 49505.83,49434.17 49350,49590 49350,50047.08 49142.92,50254.17 48417.92,50254.17 48407.08,50265
GND on Mid-Layer 2 "Bottom Layer-No Net" (solid, remove dead copper, pour order 26): 47676.27,50586.14 47677.41,50585 48203,50585 48203,50581 48145,50523 47935,50523 47917,50505 47917,50435 47938,50414 48280,50414 48382,50516 48453,50516 48501,50468 48501,50405 48395,50299 48395,50256 48408,50243 48634,50243 48637,50240 48637,50211.17 47680.17,50210.83 47676,50215
VCC on Mid-Layer 2 "Bottom Layer-No Net" (solid, remove dead copper, pour order 28): 49334.17,50445 49336,50446.83 49336,50586 50167,50586 50335,50418 50345,50428 51037,50428 51154,50311 51144,50301 51144,49907 51208,49843 51299,49843 51299,49844 51498,50043 51498,50405 51493,50405 51446,50452 51446,50542 51460,50556 51755,50556 51786,50525 51786,49918 51757,49889 51757,49762 51754,49759 51671,49759 51628,49802 51113,49802 50980.83,49934.17 50845.83,49934.17 50815,49965 50680.83,49965 50540.83,50105 50501.88,50105 50457.92,50148.96 50400,50148.96 50385,50133.96 50260.96,50133.96 50247,50147.92 50085.53,50147.92 49943,50290.45 49943,50393 49912,50424 49657,50424 49598,50483
GND on Bottom Layer "Bottom Layer-No Net" (solid, remove dead copper, pour order 32): 48542.92,50552.92 48768.96,50552.92 48776.04,50545.83 48776.04,50487.92 48787.92,50476.04 48977.08,50476.04 48987.08,50486.04 49276.04,50486.04 49292.08,50470 49292.08,50361.04 49268.96,50337.92 49232.92,50337.92 49207.92,50362.92 48619.17,50362.92 48602.92,50379.17 48602.92,50447.92 48590.83,50460 48540.83,50460 48522.92,50477.92 48522.92,50532.92
VCC on Bottom Layer "Bottom Layer-No Net" (solid, remove dead copper, pour order 34): 48419.17,50315 48477.08,50315 48502.08,50340 49197.92,50340 49240,50297.92 49240,50270 49226.04,50256.04 49180,50256.04 49131.88,50304.17 49067.08,50304.17 49003.75,50240.83 48920.83,50240.83 48897.67,50264 48838.17,50264 48817.08,50242.92 48422.92,50242.92 48410,50255.83 48410,50305.83
VCC on Bottom Layer "Bottom Layer-No Net" (solid, remove dead copper, pour order 36): 50993.96,50385 51113.96,50385 51122.92,50376.04 51122.92,49985 51085,49947.08 51085,49724.17 50960.83,49600 50875,49600 50739.17,49464.17 50639.17,49464.17 50630.42,49472.92 50630.42,49550.83 50862.08,49782.5 50862.08,49900.83 50944.17,49982.92 50944.17,50232.08 50877.29,50298.96 50836.04,50298.96 50735,50197.92 50735,49860 50718.96,49843.96 50647.92,49843.96 50647.92,49876.88 50695,49923.96 50695,50220 50826.04,50351.04 50893.96,50351.04

## Keep-outs
Keep-Out Layer:
  lines w7.87: 47676.27,50236.55 47676.27,49412.8 47682.94,49412.8 52334.4,49412.8 52334.4,50021.55 ; 47676.26,50237.02 ccw(c47674.2,50304.99) 47676.26,50372.96 ; 47676.27,50373.22 47676.27,50586.14 ; 47678.15,50586.14 50913.98,50586.14 ; 50914.3,50585.36 ccw(c50982.19,50589.22) 51050.11,50585.97 ; 51051.69,50587.35 52334.4,50587.35 52334.4,50154.85 ; 52334.09,50153.39 ccw(c52342.64,50087.95) 52334.71,50022.43

## Other copper
Top Layer:
  rectangle net GND: 48436,50481 48473.01,50493.75

## Silkscreen, mask and mechanical layers (free items; w line width, h text height)
Top Overlay:
  lines w7.87: 49240.53,49459.07 cw(c49182.09,49510.72) 49242.34,49461.19 ; 50635,50231.97 50626.67,50223.64 50626.67,50126.35 50559.79,50126.35 50559.79,50024.47 50607.09,50024.47 50622.29,50039.68 50690.84,50039.68 50696.25,50045.1 50696.25,50092.39 50719.38,50115.51 50737.5,50115.51 ; 50895.95,49459.49 cw(c50837.5,49511.14) 50897.76,49461.61
  lines w21.65: 47724.17,50088.22 47753.75,50088.22 ; 47801.67,50088.64 47849.59,50088.64 ; 47897.5,50088.64 47950.42,50088.64 ; 47998.75,50087.39 48050,50087.39 ; 48096.67,50088.64 48150.42,50088.64 ; 48200,50088.64 48251.25,50088.64 ; 48301.25,50088.64 48347.92,50088.64 ; 48394.59,50089.47 48447.09,50089.47 ; 48495.84,50089.47 48545.84,50089.47 ; 48601.67,50089.89 48652.92,50089.89 ; 48702.09,50089.47 48752.09,50089.47 ; 48820,50090.72 48873.34,50090.72 ; 48918.75,50091.14 48970,50091.14 ; 49103.75,50055.3 49127.09,50031.97 ; 49181.67,49968.64 49214.59,49935.72 ; 49237.09,49848.64 49237.09,49891.55 ; 49238.34,49690.3 49238.34,49729.89 ; 49238.34,49768.22 49238.34,49805.72 ; 49238.75,49614.05 49238.75,49655.72
  text "ICT4" at 50967,50430 h24 r90
  text "ID4" at 47745,50427 h27.56
  text "ID2" at 50858.75,50344.47 h27.56 r90
  text "ICT3" at 47800,50287 h31.5 r90
  text "EN11CTLBI VER.A" at 49035,50126.97 h31.5
  text "ICT2" at 52323,49903 h31.5 r90
  text "ID5" at 47743.75,49586.97 h25.59
  text "ICT5" at 50940.84,49489.05 h31.5
  text "ICT1" at 49300.42,49449.89 h31.5
Bottom Overlay:
  rectangle: 47860.83,49680 48116.67,50089.17
  text "DANGER;DON'T TOUCH THIS AREA." at 48319.17,50137.5 h23.62
  text "8-3" at 48577,50009 h39.37 r90

## Text inside footprints (layer, text, board x,y; h text height)
3: Bottom Overlay "JOVEJVE-M2" at 48442,50344 h35.43 r90; Bottom Overlay "108524A" at 48381,50320 h47.24 r90; Bottom Overlay "94V-0" at 48504,50151 h35.43 r90; Bottom Overlay "E232940" at 48572,50289 h35.43 r90
D603: Top Overlay "2" at 51152.83,50543.01 h23.62
D604: Top Overlay "+" at 51201.9,50171.97 h23.62
D617: Bottom Overlay "2" at 52261.46,50511.04 h23.62 r90
J600: Top Overlay "1" at 49516.67,49446.14 h23.62; Top Overlay "14" at 50628.75,49442.8 h23.62
J601: Bottom Overlay "10" at 50310.65,50395.3 h23.62; Bottom Overlay "6" at 50709.81,50395.72 h23.62; Top Overlay "1" at 50292.73,50396.97 h23.62; Top Overlay "5" at 50686.06,50396.14 h23.62
J603: Top Overlay "1" at 47913.79,49445.3 h23.62; Top Overlay "14" at 49025.87,49441.97 h23.62
J604: Top Overlay "1" at 51177.28,49446.14 h23.62; Top Overlay "14" at 52289.36,49442.8 h23.62
T602: Bottom Overlay "2" at 51909.68,49851.44 h23.62 r90; Bottom Overlay "3" at 51910.83,49817.62 h23.62 r90; Bottom Overlay "1" at 52091.12,49849.64 h23.62 r90; Bottom Overlay "4" at 52091.67,49815.59 h23.62 r90
U620: Bottom Overlay "1" at 49380.08,50060.75 h23.62